# Altium PCB PCB_Bat.PcbDoc (part 1 of 2)
Units mm, origin at the board's own origin, x right, y up, seen from the top; angles counter-clockwise.
Board outline 154 x 85 mm, 2 copper layers (Top Layer, Bottom Layer); 134 components, 100 nets, 509 pads, 1285 vias.
Unrouted connection lines stored in the file: 8.
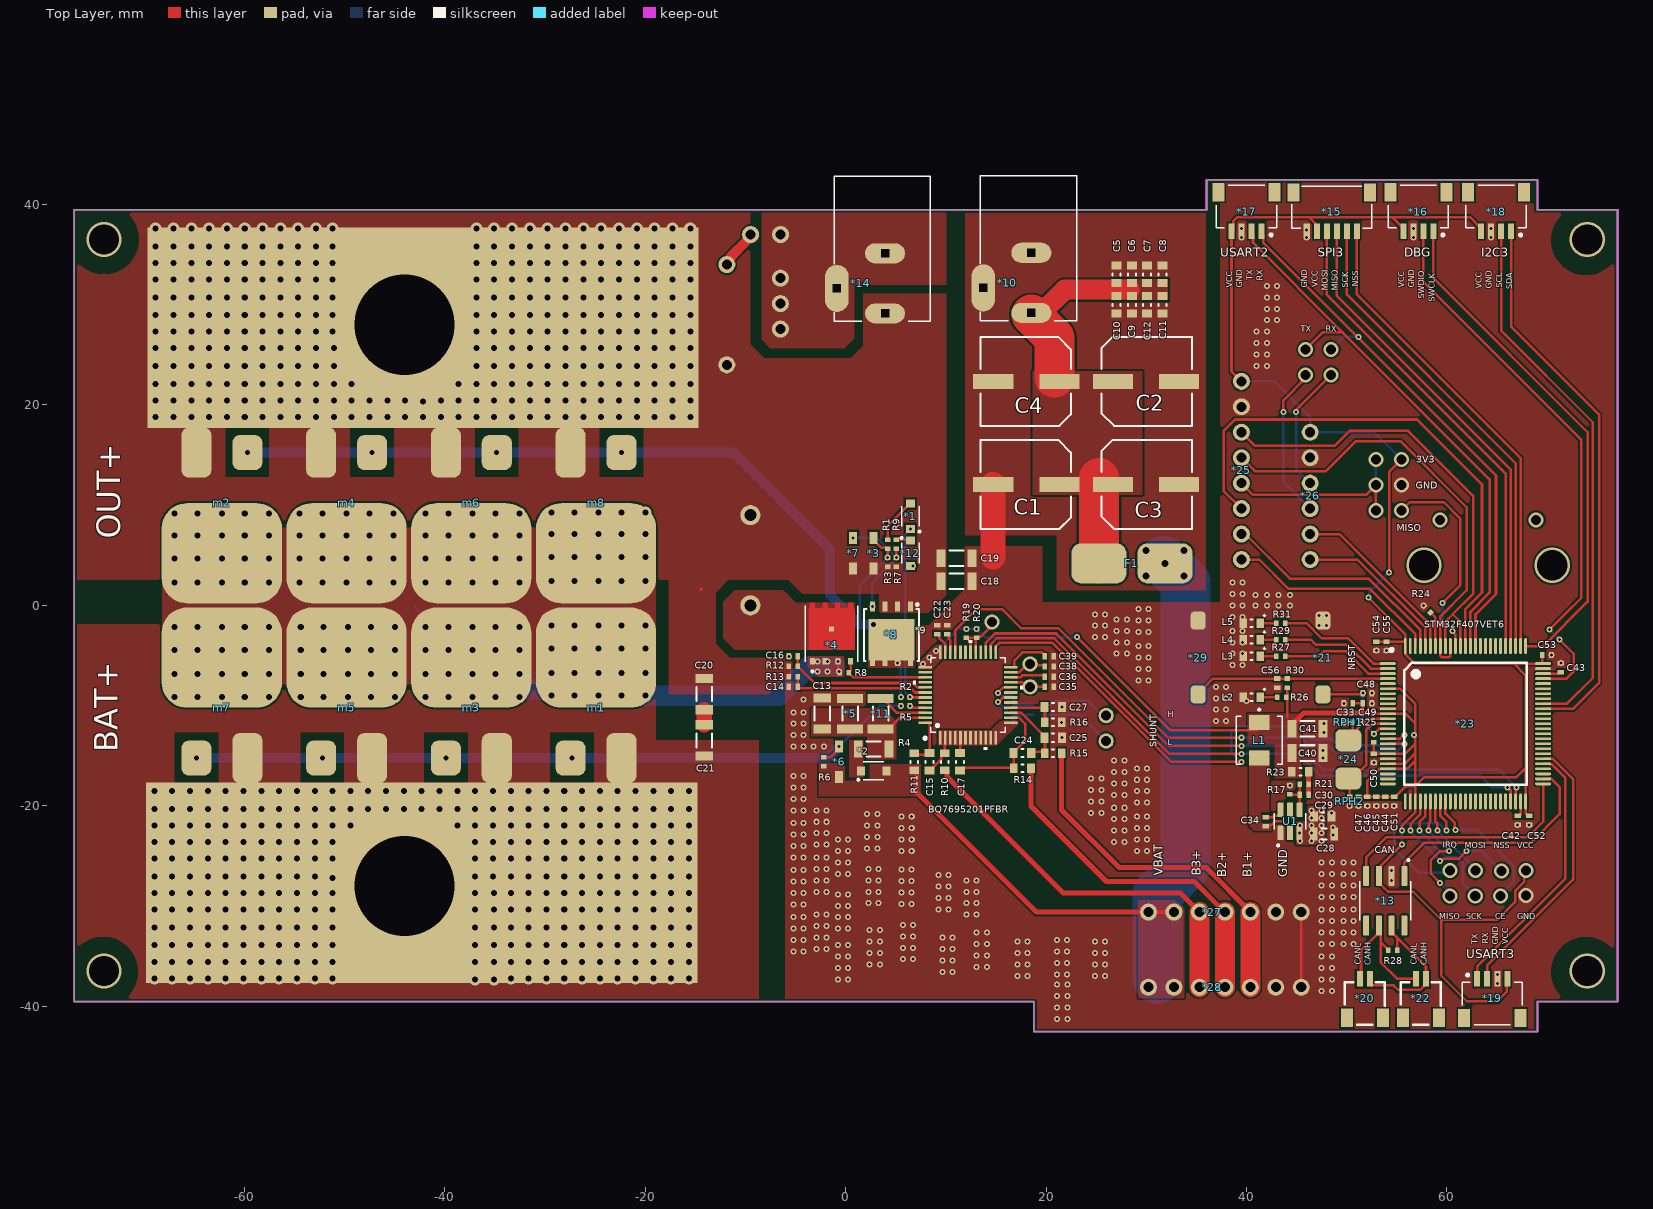
[diagram p0: Top Layer view]
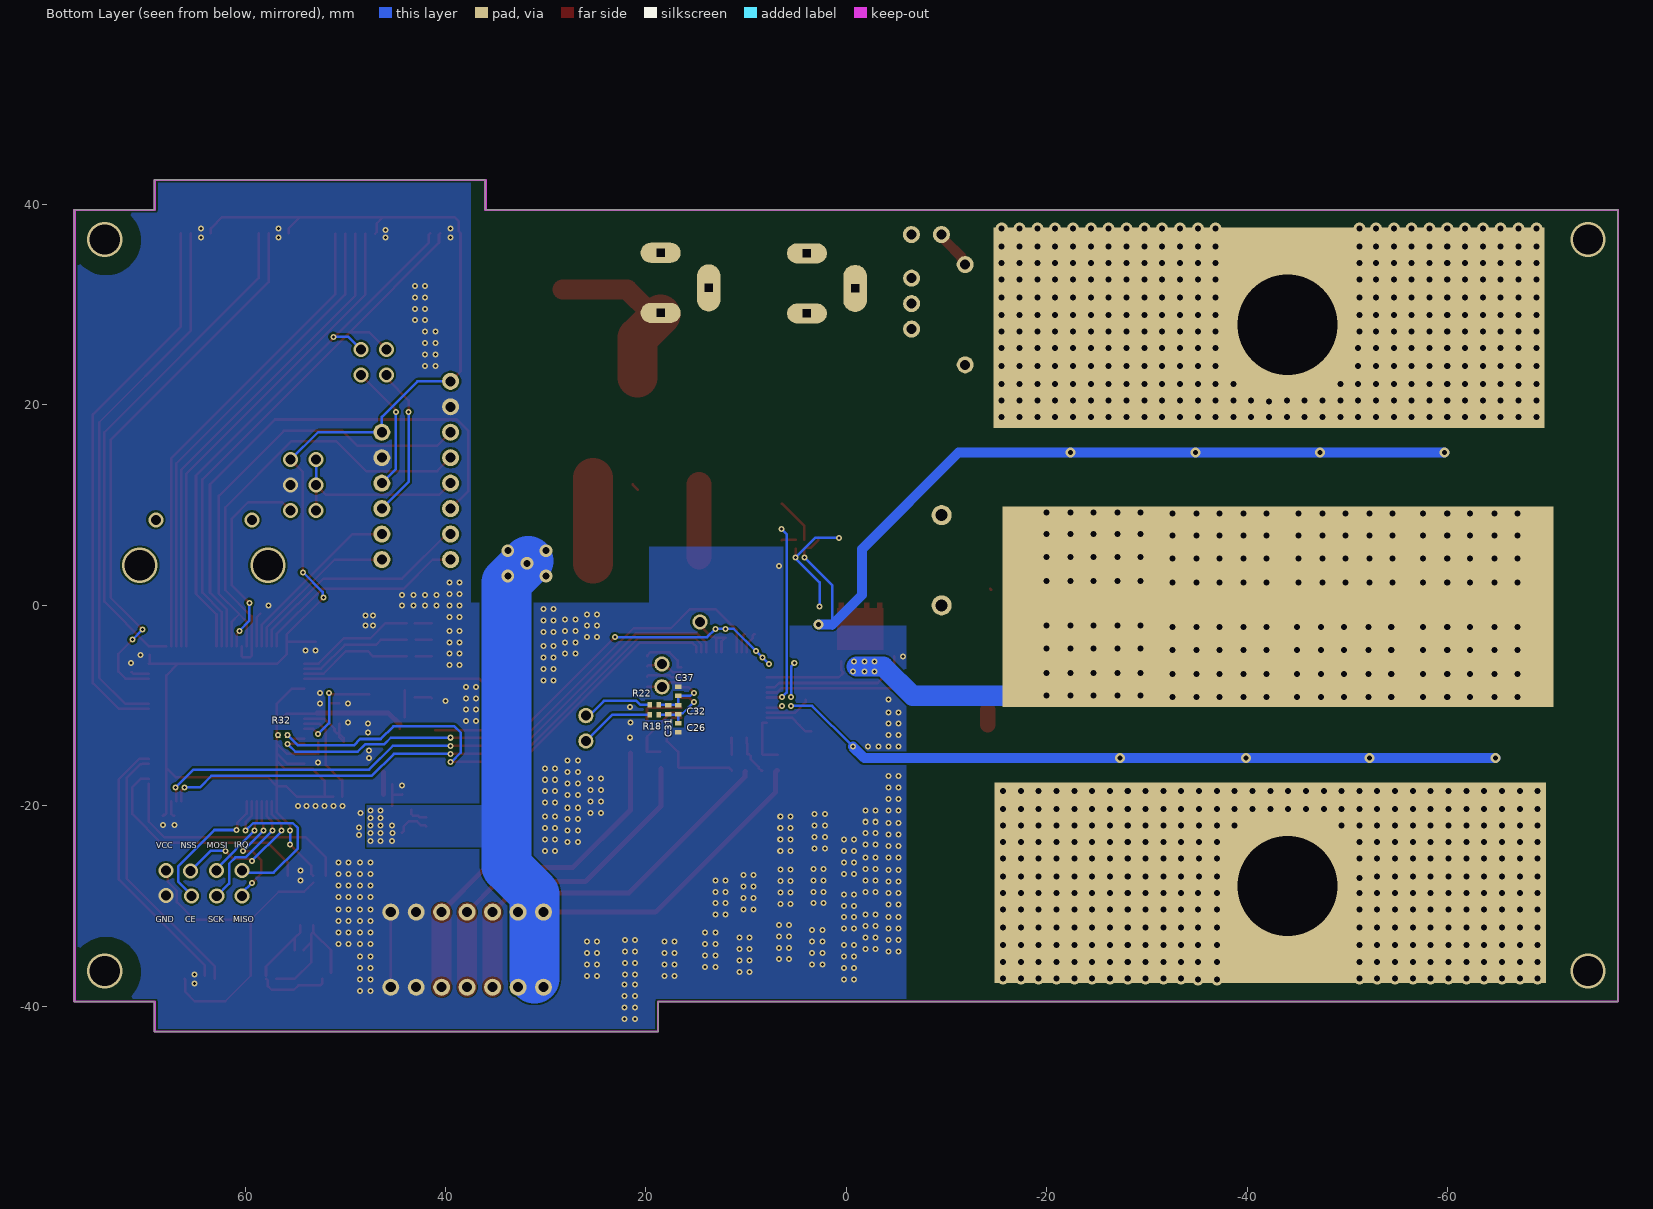
[diagram p1: Bottom Layer view, seen from below]
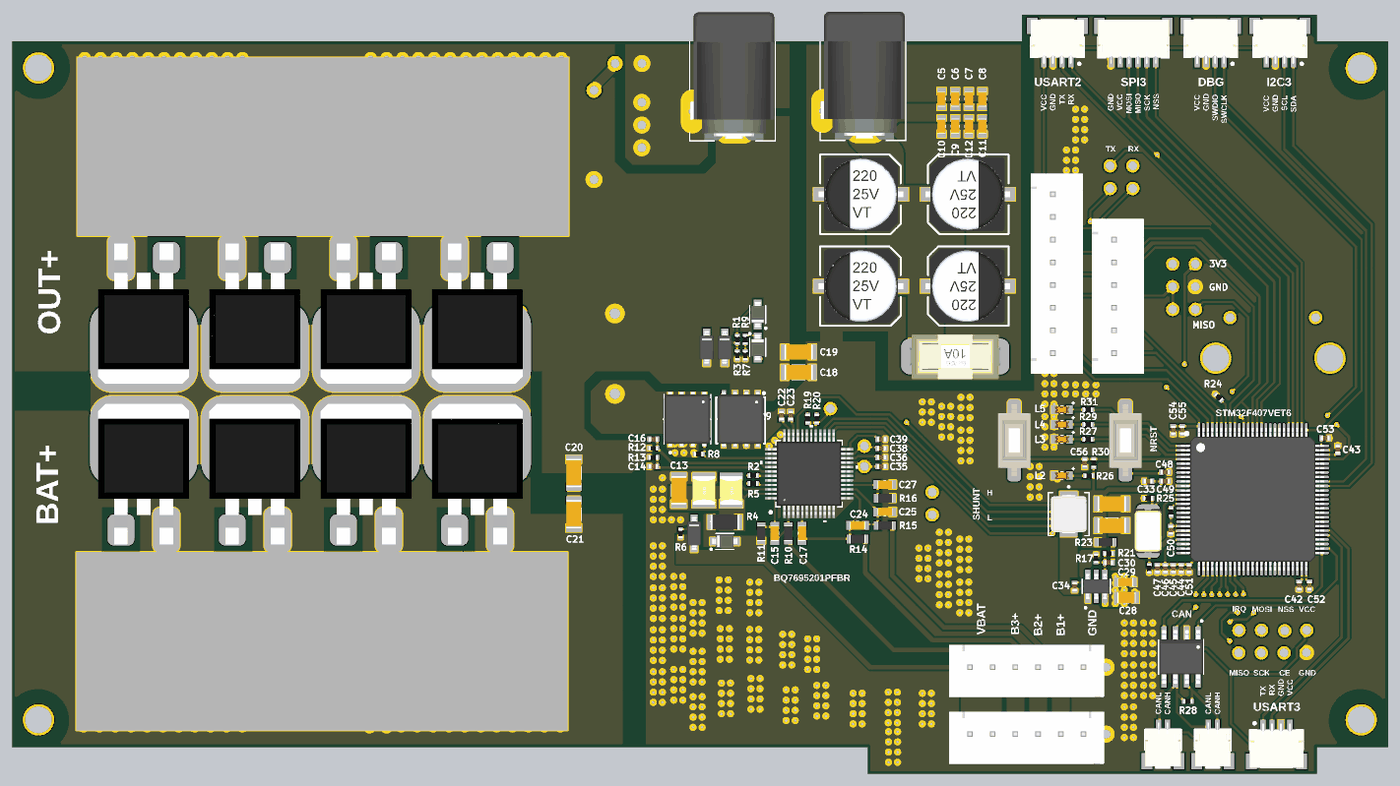
[diagram p3: 3D render of the assembled board from above, using the file's embedded part models]
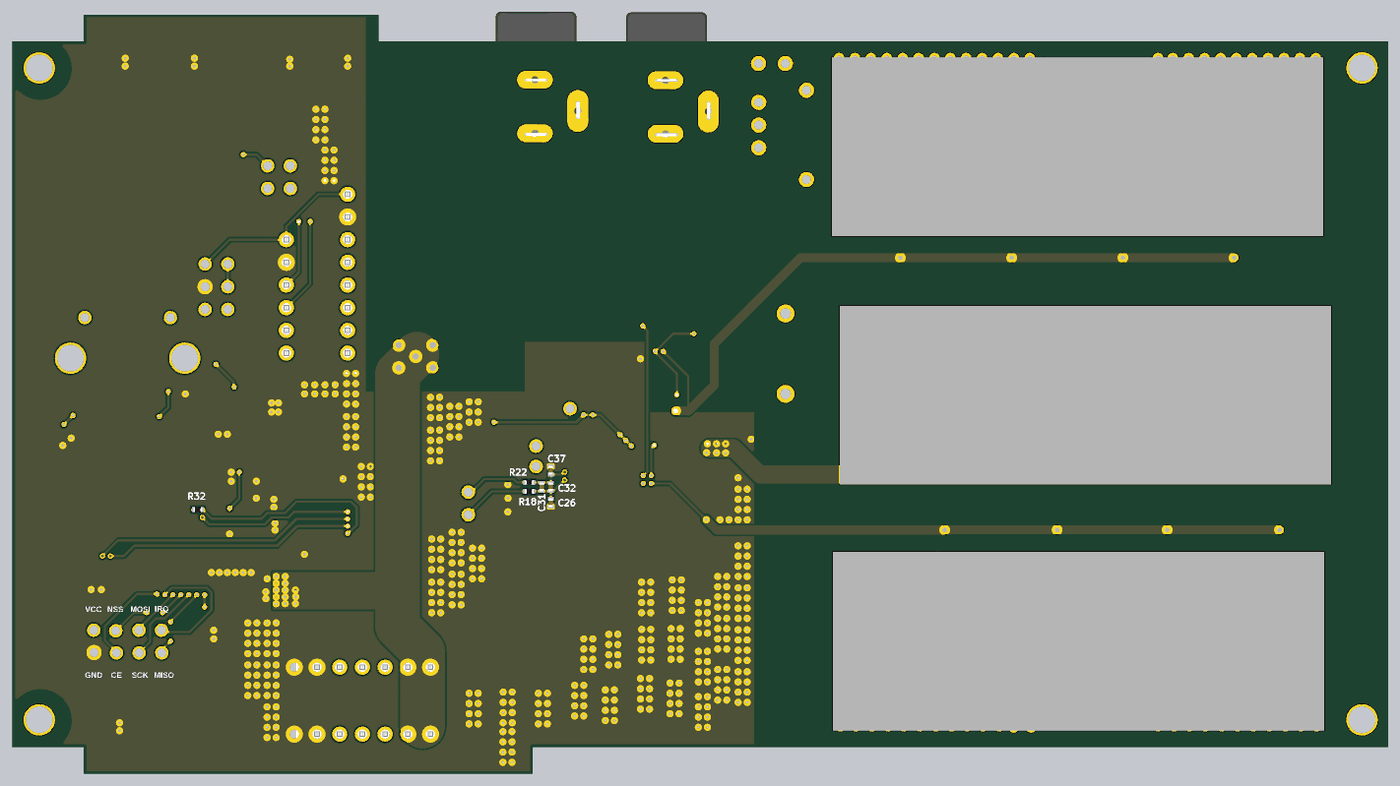
[diagram p4: 3D render of the assembled board from below, using the file's embedded part models]

## Layer stack, top to bottom
Top Solder: solder mask 0.0102, Solder Resist, Dk 3.5
Top Layer: signal copper 0.0356
Dielectric 1: dielectric 0.32, FR-4, Dk 4.8
Bottom Layer: signal copper 0.0356
Bottom Solder: solder mask 0.0102, Solder Resist, Dk 3.5

## Board outline
18.796,-42.539 18.796,-39.539 -76.956,-39.539 -76.956,39.461 36.044,39.461 36.044,42.461 69.044,42.461 69.044,39.461 77.044,39.461 77.044,-39.539 69.044,-39.539 69.044,-42.539

## Design rules (kind name [scope] priority, off if disabled: settings)
Clearance [All] p1: gap=0.2 ignorepadtopadclearanceinfootprint=TRUE
PlaneConnect [All] p1: planeconnectstyle=Direct reliefexpansion=0.508 reliefentries=4 reliefconductorwidth=0.254 reliefairgap=0.254
PolygonConnect [All] p1: connectstyle=Direct reliefconductorwidth=0.254 reliefentries=4 polygonreliefangle="90 Angle" airgapwidth=0.254
RoutingVias [All] p1: holewidth=0.3 width=0.6 viastyle="Through Hole" minholewidth=0.3 minwidth=0.6 maxholewidth=10 maxwidth=10
SolderMaskExpansion [All] p1: expansion=0.102 istentingtop=FALSE
SupplyNets "Schematic Supply Nets_2" [InNet('OUT+')] p1: voltage=0.000
SupplyNets "Schematic Supply Nets_3" [InNet('GND')] p2: voltage=0.000
SupplyNets "Schematic Supply Nets" [InNet('BAT+')] p3: voltage=0.000
SupplyNets "Schematic Supply Nets_1" [InNet('VCC_3V')] p4: voltage=0.000
Width [All] p1: maxlimit=10 minlimit=0.254 preferedwidth=0.254
29 further rules are at their usual default settings.

## Components (designator, comment, footprint, x,y, rotation, side; value= is the part's Value field where it differs from the comment)
*1 "1N5819_SOD323" 1N5819_SOD323 6.477,8.89 r270 top
*2 "1N5819_SOD323" 1N5819_SOD323 2.794,-16.51 r180 top
*3 "MMSZ5246B-7-F-16V" MMSZ5246B-7-F-16V 2.794,5.207 r270 top
*4 "AON6407" AON6407 -1.397,-2.373 r90 top
*5 "1uF" CAP_1210 0.45,-10.795 r270 top
*6 "MMSZ5246B-7-F-16V" MMSZ5246B-7-F-16V -0.635,-15.621 r270 top
*7 "MMSZ5246B-7-F-16V" MMSZ5246B-7-F-16V 0.762,5.207 r270 top
*8 "AON6354" AON6354 4.572,-3.096 r270 top
*9 "BQ7695201PFBR" BQ7695201PFBR 12.217,-8.943 r90 top
*10 "DC005" DC005 18.669,31.679 r270 top
*11 "0.47uF" CAP_1210 3.498,-10.795 r270 top
*12 "1N5819_SOD323" 1N5819_SOD323 6.477,5.207 r90 top
*13 "SN65HVD232DR" SN65HVD232DR 53.848,-29.464 r270 top
*14 "DC005" DC005 4.064,31.623 r270 top
*15 "SM06B" SM06B 48.514,39.243 r180 top
*16 "SM04B" SM04B 57.15,39.5 r180 top
*17 "SM04B" SM04B 40.005,39.5 r180 top
*18 "SM04B" SM04B 64.903,39.5 r180 top
*19 "SM04B" SM04B 64.522,-39.432 r0 top
*20 "SM02B" SMB02 51.816,-39.751 r0 top
*21 "3x6x2.5" 3x6x2.5 47.625,-5.207 r270 top
*22 "SM02B" SMB02 57.404,-39.751 r0 top
*23 "STM32F407VET6" STM32F407VET6 62.23,-11.176 r0 top
*24 "CRYSTAL_5032" CRYSTAL_5032 50.165,-15.367 r270 top
*25 "XH_8P_Vertical" XH_8P_Vertical 39.497,13.462 r270 top
*26 "XH_6P_Vertical" XH_6P_Vertical 46.355,10.922 r270 top
*27 "XH_6P_Vertical" XH_6P_Vertical 36.576,-30.607 r180 top
*28 "XH_6P_Vertical" XH_6P_Vertical 36.576,-38.1 r180 top
*29 "3x6x2.5" 3x6x2.5 35.179,-5.207 r270 top
C1 "220uF" E-CAP_8x10 18.034,12.065 r180 top
C2 "220uF" E-CAP_8x10 29.972,22.352 r0 top
C3 "220uF" E-CAP_8x10 29.972,12.065 r0 top
C4 "220uF" E-CAP_8x10 18.034,22.352 r180 top
C5 "0.1uF" CAP_0603 27.051,33.02 r270 top
C6 "0.1uF" CAP_0603 28.575,33.02 r270 top
C7 "0.1uF" CAP_0603 30.099,33.02 r270 top
C8 "0.1uF" CAP_0603 31.623,33.02 r270 top
C9 "1uF" CAP_0603 28.575,29.972 r90 top
C10 "1uF" CAP_0603 27.051,29.972 r90 top
C11 "1uF" CAP_0603 31.623,29.972 r90 top
C12 "1uF" CAP_0603 30.099,29.972 r90 top
C13 "100pF" CAP_1206 -2.344,-10.795 r270 top
C14 "0.1uF" CAP_0402 -5.207,-8.128 r180 top
C15 "220nF" CAP_0603 8.382,-15.621 r270 top
C16 "0.1uF" CAP_0402 -5.207,-5.08 r0 top
C17 "220nF" CAP_0603 11.43,-15.621 r90 top
C18 "0.1uF" CAP_1206 11.049,2.413 r180 top
C19 "0.1uF" CAP_1206 11.049,4.699 r180 top
C20 "0.1uF" CAP_1206 -14.097,-8.864 r270 top
C21 "0.1uF" CAP_1206 -14.097,-13.462 r270 top
C22 "0.1uF" CAP_0402 9.144,-2.413 r90 top
C23 "0.1uF" CAP_0402 10.16,-2.413 r90 top
C24 "220nF" CAP_0603 17.653,-14.732 r180 top
C25 "220nF" CAP_0603 20.701,-13.208 r180 top
C26 "0.1uF" CAP_0402 16.764,-12.192 r270 bottom
C27 "220nF" CAP_0603 20.701,-10.16 r180 top
C28 "10uF" CAP_0805 47.752,-22.86 r0 top
C29 "0.1uF" CAP_0603 47.625,-21.082 r180 top
C30 "47pF" CAP_0402 45.753,-18.887 r180 top
C31 "0.1uF" CAP_0402 17.78,-10.414 r270 bottom
C32 "100pF" CAP_0402 16.764,-10.414 r270 bottom
C33 "0.1uF" CAP_0402 50.165,-9.779 r180 top
C34 "0.1uF" CAP_0402 41.93,-21.591 r90 top
C35 "0.1uF" CAP_0402 20.32,-8.128 r180 top
C36 "0.1uF" CAP_0402 20.32,-7.112 r180 top
C37 "0.1uF" CAP_0402 16.764,-8.567 r270 bottom
C38 "0.1uF" CAP_0402 20.32,-6.096 r180 top
C39 "2.2uF" CAP_0402 20.32,-5.08 r180 top
C40 "22uF" CAP_1206 46.101,-14.732 r180 top
C41 "22uF" CAP_1206 46.101,-12.319 r180 top
C42 "10uF" CAP_0402 67.056,-21.463 r90 top
C43 "10uF" CAP_0402 71.374,-6.223 r270 top
C44 "0.1uF" CAP_0402 53.848,-19.558 r270 top
C45 "1uF" CAP_0402 52.959,-19.558 r90 top
C46 "0.1uF" CAP_0402 52.07,-19.558 r90 top
C47 "1uF" CAP_0402 51.181,-19.558 r90 top
C48 "0.1uF" CAP_0402 52.07,-8.763 r0 top
C49 "0.1uF" CAP_0402 52.07,-9.779 r180 top
C50 "0.1uF" CAP_0402 52.705,-15.24 r90 top
C51 "0.1uF" CAP_0402 54.737,-19.558 r90 top
C52 "0.1uF" CAP_0402 68.199,-21.463 r90 top
C53 "0.1uF" CAP_0402 69.977,-4.953 r180 top
C54 "0.1uF" CAP_0402 52.959,-4.064 r90 top
C55 "4.7uF" CAP_0402 53.975,-4.064 r90 top
C56 "0.1uF" CAP_0402 43.053,-7.747 r90 top
F1 "3A" FUSE_HOLDER_1808/2410 28.575,4.191 r180 top
L1 "6.8uH" IND_0420 41.275,-13.462 r270 top
L2 "LED_0603" LED_0603 40.513,-9.144 r0 top
L3 "LED_0603" LED_0603 40.513,-5.08 r0 top
L4 "LED_0603" LED_0603 40.513,-3.429 r0 top
L5 "LED_0603" LED_0603 40.513,-1.778 r0 top
m1 "TO-263" TO-263 -24.892,-7.239 r0 top
m2 "TO-263" TO-263 -62.23,7.239 r180 top
m3 "TO-263" TO-263 -37.338,-7.239 r0 top
m4 "TO-263" TO-263 -49.784,7.239 r180 top
m5 "TO-263" TO-263 -49.784,-7.239 r0 top
m6 "TO-263" TO-263 -37.338,7.239 r180 top
m7 "TO-263" TO-263 -62.23,-7.239 r0 top
m8 "TO-263" TO-263 -24.892,7.239 r180 top
R1 "7.5K" RES_0402 4.191,6.096 r90 top
R2 "10K" RES_0402 5.969,-9.144 r0 top
R3 "10M" RES_0402 4.191,4.318 r90 top
R4 "100R" res_1206 2.794,-14.351 r0 top
R5 "5.1K" RES_0402 5.969,-10.033 r180 top
R6 "10M" RES_0402 -2.159,-15.621 r90 top
R7 "10M" RES_0402 5.08,4.318 r270 top
R8 "10M" RES_0402 -0.127,-6.731 r0 top
R9 "10K" RES_0402 5.08,6.096 r270 top
R10 "20R" RES_0603 9.906,-15.621 r90 top
R11 "20R" RES_0603 6.858,-15.621 r270 top
R12 "10K" RES_0402 -5.207,-6.096 r180 top
R13 "10K" RES_0402 -5.207,-7.112 r180 top
R14 "20R" RES_0603 17.653,-16.256 r180 top
R15 "20R" RES_0603 20.701,-14.732 r180 top
R16 "20R" RES_0603 20.701,-11.684 r180 top
R17 "20K" RES_0402 44.323,-18.415 r90 top
R18 "100R" RES_0402 19.177,-10.922 r180 bottom
R19 "10K" RES_0402 12.065,-2.794 r90 top
R20 "10K" RES_0402 13.081,-2.794 r90 top
R21 "91K" RES_0402 45.753,-17.871 r180 top
R22 "100R" RES_0402 19.177,-9.906 r180 bottom
R23 "49.9R" RES_0603 45.372,-16.601 r180 top
R24 "10K" RES_0402 58.039,-0.381 r315 top
R25 "10K" RES_0402 52.705,-13.208 r270 top
R26 "1K" RES_0402 43.536,-9.177 r180 top
R27 "1K" RES_0402 43.434,-5.08 r0 top
R28 "120R" RES_0402 54.61,-34.417 r0 top
R29 "1K" RES_0402 43.434,-3.429 r180 top
R30 "10K" RES_0402 44.069,-7.747 r90 top
R31 "1K" RES_0402 43.434,-1.778 r180 top
R32 "10K" RES_0402 56.261,-12.954 r0 bottom
RPH1 "20pF" RES_0402 50.165,-11.684 r180 top
RPH2 "20pF" RES_0402 50.292,-19.558 r90 top
U1 "TPS54302DDCT" SOT95P280X110-6N 44.356,-21.554 r90 top

## Footprints (in the part's own frame and the unit in brackets; to place one, negate y for a bottom-side part, rotate by r counter-clockwise, add the part's x,y. Pads: shape width x height; smd on the part's side, far side on the other; paste and mask are expansions set on the pad)
1N5819_SOD323 [mm]
  rect 0.8x0.9 smd: 1(1.27,0) 2(-1.27,0)
  silkscreen extent -1.02,-0.89 1.62,0.99, body extent -1.43,-0.75 1.43,0.75, height 1.16
3x6x2.5 [mm]
  rrect50% 1.8x1.5 smd: 1(3.683,0) 2(-3.683,0)
  body extent -4.03,-1.83 4.03,1.83, height 2.51
AON6354 [mm]
  rect 1x0.5 smd: 1(-3,-1.905) 3(-3,1.905) 3(-3,-0.635) 3(-3,0.635)
  rect 4.12x4.6 smd: 2(0.333,0)
  rect 0.55x0.5 smd: 2(2.668,1.905) 2(2.668,-0.635) 2(2.668,0.635) 2(2.668,-1.905)
  silkscreen extent -3.26,-2.75 2.47,2.75, body extent -3.28,-2.75 2.77,2.75, height 0.95
AON6407 [mm]
  rect 0.65x0.5 smd: 1(-3.215,1.905) 2(-3.215,0.635) 3(-3.215,-0.635) 4(-3.215,-1.905)
  rect 0.5x0.5 smd paste-1 mask+0: 5_8(0,0)
  Top Layer region: 2.06,2.155 2.61,2.155 2.61,1.655 2.06,1.655 2.06,0.885 2.61,0.885 2.61,0.385 2.06,0.385 2.06,-0.385 2.61,-0.385 2.61,-0.885 2.06,-0.885 2.06,-1.655 2.61,-1.655 2.61,-2.155 2.06,-2.155 2.06,-2.3 -2.06,-2.3 -2.06,2.3 2.06,2.3
  silkscreen extent -4.31,-2.62 2.32,2.62, body extent -3.48,-2.75 2.57,2.75, height 0.95
BQ7695201PFBR [mil]
  rect 53.5x10 smd paste+0 mask+0: 1(-168.25,108.3) 2(-168.25,88.6) 3(-168.25,68.91) 4(-168.25,49.22) 5(-168.25,29.53) 6(-168.25,9.85) 7(-168.25,-9.85) 8(-168.25,-29.53) 9(-168.25,-49.22) 10(-168.25,-68.91) 11(-168.25,-88.61) 12(-168.25,-108.29) 25(168.25,-108.29) 26(168.25,-88.61) 27(168.25,-68.91) 28(168.25,-49.22) 29(168.25,-29.53) 30(168.25,-9.85) 31(168.25,9.85) 32(168.25,29.53) 33(168.25,49.22) 34(168.25,68.91) 35(168.25,88.6) 36(168.25,108.3)
  rect 10x53.5 smd paste+0 mask+0: 13(-108.29,-168.25) 14(-88.61,-168.25) 15(-68.91,-168.25) 16(-49.22,-168.25) 17(-29.53,-168.25) 18(-9.84,-168.25) 19(9.85,-168.25) 20(29.54,-168.25) 21(49.22,-168.25) 22(68.91,-168.25) 23(88.61,-168.25) 24(108.3,-168.25) 37(108.3,168.25) 38(88.61,168.25) 39(68.91,168.25) 40(49.22,168.25) 41(29.54,168.25) 42(9.85,168.25) 43(-9.84,168.25) 44(-29.53,168.25) 45(-49.22,168.25) 46(-68.91,168.25) 47(-88.61,168.25) 48(-108.29,168.25)
  silkscreen extent -215,-215 215,215, body extent -181,-181 181,181, height 47
CAP_0402 [mm]
  rect 0.45x0.64 smd: 1(-0.45,0) 2(0.45,0)
  body extent -0.5,-0.25 0.5,0.25, height 0.55
CAP_0603 [mm]
  rect 0.8x1 smd: 1(-0.875,0) 2(0.875,0)
  silkscreen extent -0.1,-0.4 0.1,0.4, body extent -0.87,-0.48 0.87,0.48, height 0.7
CAP_0805 [mm]
  rect 0.75x1.3 smd: 1(-1.025,0.056) 2(1.025,0.056)
  silkscreen extent -0.25,-0.49 0.25,0.61, body extent -1.02,-0.57 1.03,0.68, height 0.7
CAP_1206 [mm]
  rect 0.9x1.75 smd: 1(-1.55,0) 2(1.55,0)
  silkscreen extent -0.7,-0.77 0.7,0.77, body extent -1.6,-0.85 1.6,0.85, height 0.7
CAP_1210 [mm]
  rect 0.9x2.6 smd: 1(-1.524,0) 2(1.524,0)
  silkscreen extent -0.7,-0.77 0.7,0.77, body extent -1.6,-1.25 1.6,1.25, height 2.7
CRYSTAL_5032 [mm]
  rrect50% 2.2x2.6 smd: 1(-1.905,0) 2(1.905,0)
  body extent -2.5,-1.6 2.5,1.6, height 0.8
DC005 [mm]
  oval 4.7x2.35 hole 0.8 square: 1(0,-4.927)
  oval 2x4 hole 0.8 square: 2(-3.5,-0.127) 3(2.5,-0.127)
  silkscreen extent -11.18,-5.21 3.3,4.37, body extent -11.09,-5.15 3.21,4.25, height 11
E-CAP_8x10 [mm]
  rect 4x1.5 smd: 1(-3.302,0) 2(3.302,0)
  silkscreen extent -4.45,-4.45 4.57,4.45, body extent -4.75,-4.15 4.75,4.15, height 10.51
FUSE_HOLDER_1808/2410 [mm]
  rrect50% 5.5x4 smd: 1(-3.302,0) 2(3.302,0)
  body extent -5.1,-2.49 5.1,2.54, height 4.16
IND_0420 [mm]
  rect 1.5x2 smd: 1(-1.778,0) 2(1.778,0)
  silkscreen extent -3.15,-2.29 2.41,2.29, body extent -2.15,-2 2.15,2, height 2.2
LED_0603 [mm]
  rect 0.75x0.95 smd: 1(-0.85,0) 2(0.85,0)
  silkscreen extent -0.1,-0.38 1.4,0.89, body extent -0.8,-0.4 0.8,0.4, height 0.53
MMSZ5246B-7-F-16V [mm]
  rect 1.2x0.8 smd: 1(-1.524,0) 2(1.524,0)
  body extent -1.83,-0.77 1.83,0.77, height 1.44
RES_0402 [mm]
  rect 0.45x0.55 smd: 1(-0.45,0) 2(0.45,0)
  body extent -0.51,-0.25 0.51,0.25, height 0.36
RES_0603 [mm]
  rect 0.75x0.95 smd: 1(-0.85,0) 2(0.85,0)
  silkscreen extent -0.1,-0.38 0.1,0.38, body extent -0.87,-0.48 0.87,0.48, height 0.7
res_1206 [mm]
  rect 0.85x1.7 smd: 1(-1.51,0.015) 2(1.54,0.015)
  silkscreen extent -0.68,-0.73 0.72,0.77, body extent -1.58,-0.83 1.62,0.87, height 0.7
SM04B [mm]
  rect 0.6x1.55 smd: 1(-1.5,2.159) 2(-0.5,2.159) 3(0.5,2.159) 4(1.5,2.159)
  rect 1.2x1.8 smd: S1(-2.8,-1.716) S2(2.8,-1.716)
  silkscreen extent -3,-2.42 3,2.64, body extent -3,-2.41 3,2.54, height 3.25
SM06B [mm]
  rect 0.6x1.55 smd: 1(-2.5,1.905) 2(-1.5,1.905) 3(-0.5,1.905) 4(0.5,1.905) 5(1.5,1.905) 6(2.5,1.905)
  rect 1.2x1.8 smd: S1(-3.8,-1.97) S2(3.8,-1.97)
  silkscreen extent -4,-2.6 4,1.61, body extent -4,-2.67 4,2.28, height 2.95
SMB02 [mm]
  rect 0.6x1.55 smd: 1(-0.5,2.483) 2(0.5,2.483)
  rect 1.2x1.8 smd: S1(-1.8,-1.392) S2(1.8,-1.392)
  silkscreen extent -2,-2.09 2,2.16, body extent -2,-1.97 2,2.98, height 2.95
SN65HVD232DR [mm]
  rrect25% 1.97x0.6 smd: 1(-2.47,1.905) 2(-2.47,0.635) 3(-2.47,-0.635) 4(-2.47,-1.905) 5(2.47,-1.905) 6(2.47,-0.635) 7(2.47,0.635) 8(2.47,1.905)
  silkscreen extent -4.14,-2.52 1.95,2.52, body extent -3,-2.45 3,2.45, height 1.75
SOT95P280X110-6N [mm]
  rrect25% 1.45x0.59 smd: 1(-1.155,0.95) 2(-1.155,0) 3(-1.155,-0.95) 4(1.155,-0.95) 5(1.155,0) 6(1.155,0.95)
  silkscreen extent -2.5,-1.57 0.8,1.57, body extent -1.4,-1.45 1.4,1.45, height 1.1
STM32F407VET6 [mm]
  oval 1.6x0.28 smd: 1(-8.131,5.365) 2(-8.131,4.865) 3(-8.131,4.365) 4(-8.131,3.865) 5(-8.131,3.365) 6(-8.131,2.865) 7(-8.131,2.365) 8(-8.131,1.865) 9(-8.131,1.365) 10(-8.131,0.865) 11(-8.131,0.365) 12(-8.131,-0.135) 13(-8.131,-0.635) 14(-8.131,-1.135) 15(-8.131,-1.635) 16(-8.131,-2.135) 17(-8.131,-2.635) 18(-8.131,-3.135) 19(-8.131,-3.635) 20(-8.131,-4.135) 21(-8.131,-4.635) 22(-8.131,-5.135) 23(-8.131,-5.635) 24(-8.131,-6.135) 25(-8.131,-6.635) 51(7.369,-6.635) 52(7.369,-6.135) 53(7.369,-5.635) 54(7.369,-5.135) 55(7.369,-4.635) 56(7.369,-4.135) 57(7.369,-3.635) 58(7.369,-3.135) 59(7.369,-2.635) 60(7.369,-2.135) 61(7.369,-1.635) 62(7.369,-1.135) 63(7.369,-0.635) 64(7.369,-0.135) 65(7.369,0.365) 66(7.369,0.865) 67(7.369,1.365) 68(7.369,1.865) 69(7.369,2.365) 70(7.369,2.865) 71(7.369,3.365) 72(7.369,3.865) 73(7.369,4.365) 74(7.369,4.865) 75(7.369,5.365)
  oval 0.28x1.6 smd: 26(-6.381,-8.385) 27(-5.881,-8.385) 28(-5.381,-8.385) 29(-4.881,-8.385) 30(-4.381,-8.385) 31(-3.881,-8.385) 32(-3.381,-8.385) 33(-2.881,-8.385) 34(-2.381,-8.385) 35(-1.881,-8.385) 36(-1.381,-8.385) 37(-0.881,-8.385) 38(-0.381,-8.385) 39(0.119,-8.385) 40(0.619,-8.385) 41(1.119,-8.385) 42(1.619,-8.385) 43(2.119,-8.385) 44(2.619,-8.385) 45(3.119,-8.385) 46(3.619,-8.385) 47(4.119,-8.385) 48(4.619,-8.385) 49(5.119,-8.385) 50(5.619,-8.385) 76(5.619,7.115) 77(5.119,7.115) 78(4.619,7.115) 79(4.119,7.115) 80(3.619,7.115) 81(3.119,7.115) 82(2.619,7.115) 83(2.119,7.115) 84(1.619,7.115) 85(1.119,7.115) 86(0.619,7.115) 87(0.119,7.115) 88(-0.381,7.115) 89(-0.881,7.115) 90(-1.381,7.115) 91(-1.881,7.115) 92(-2.381,7.115) 93(-2.881,7.115) 94(-3.381,7.115) 95(-3.881,7.115) 96(-4.381,7.115) 97(-4.881,7.115) 98(-5.381,7.115) 99(-5.881,7.115) 100(-6.381,7.115)
  silkscreen extent -7.85,-6.73 5.71,6.83, body extent -8.38,-8.63 7.62,7.36, height 1.6
TO-263 [mm]
  rrect50% 12x10 smd: D(0,2.032)
  rrect50% 3x3.5 smd: G(-2.54,-8.001)
  rrect50% 3x5 smd: S(2.54,-8.001)
  body extent -5.1,-9.6 5.1,6.1, height 4.4
XH_6P_Vertical [mm]
  round 1.7 hole 1: 1(-6.35,0) 2(-3.81,0) 3(-1.27,0) 4(1.27,0) 5(3.81,0) 6(6.35,0)
  body extent -8.69,-2.49 8.69,3.35, height 7.21
XH_8P_Vertical [mm]
  round 1.7 hole 1: 1(-8.89,0) 2(-6.35,0) 3(-3.81,0) 4(-1.27,0) 5(1.27,0) 6(3.81,0) 7(6.35,0) 8(8.89,0)
  body extent -11.23,-2.49 11.23,3.35, height 7.21

## Part data
*5 *11: library part CAP_1210
C1 C2 C3 C4: library part E-CAP_8x10
C5 C6 C7 C8 C9 C10 C11 C12 C15 C17 C24 C25 C27 C29: library part CAP_0603
C13 C18 C19 C20 C21 C40 C41: library part CAP_1206
C14 C16 C22 C23 C26 C30 C31 C32 C33 C34 C35 C36 C37 C38 C39 C42 C43 C44 C45 C46 C47 C48 C49 C50 C51 C52 C53 C54 C55 C56: library part CAP_0402
C28: library part CAP_0805
F1: library part FUSE_HOLDER_1808/2410
L1: library part IND_0420
R1 R2 R3 R5 R6 R7 R8 R9 R12 R13 R17 R18 R19 R20 R21 R22 R24 R25 R26 R27 R28 R29 R30 R31 R32 RPH1 RPH2: library part RES_0402
R4: library part RES_1206
R10 R11 R14 R15 R16 R23: library part RES_0603
U1: "4.5-V to 28-V Input, 3-A Output, EMI Friendly Synchronous Step-Down Converter", Package="SOT-23-THN-6 Texas Instruments", Check_prices=https://www.snapeda.com/parts/TPS54302DDCT/Texas+Instruments/view-part/?ref=eda, MF="Texas Instruments", MP=TPS54302DDCT, SnapEDA_Link=https://www.snapeda.com/parts/TPS54302DDCT/Texas+Instruments/view-part/?ref=snap

## Free pads (board coordinates)
  rect 55x20 smd far side: 2(-43.053,-0.127) 2(-42.291,-27.686) 2(-42.164,27.686)
  rect 55x20 smd: 2(-42.291,-27.686) 2(-42.164,27.686)
  round 2 hole 1.2: 7(-9.5,0) 7(-9.5,9)
  round 1.524 hole 1: 8(14.605,-1.651) 8(18.415,-8.128) 8(18.415,-5.842) 8(26,-13.54) 8(26,-11)
  round 1.7 hole 1: 8(45.466,-38.1) 8(45.466,-30.607) 9(-11.845,24) 9(-11.845,34) 9(-9.477,37) 9(-6.5,27.563) 9(-6.5,30.103) 9(-6.5,32.643) 9(-6.477,37)
  round 15 hole 10: 9(-44,-28) 9(-44,28)

## Via types
v1: diameter 1.2, hole 0.6, Top Layer to Bottom Layer, 768 vias
v2: diameter 0.6, hole 0.3, Top Layer to Bottom Layer, 477 vias
v3: diameter 1.5, hole 1, Top Layer to Bottom Layer, 20 vias
v4: diameter 1, hole 0.5, Top Layer to Bottom Layer, 9 vias
v5: diameter 3.5, hole 3, Top Layer to Bottom Layer, 6 vias
v6: diameter 1.27, hole 0.711, Top Layer to Bottom Layer, 5 vias

## Nets (pads, with @x,y where several pads share a name; then routed paths per layer and width w, separated by ;. In a path a pad name is that pad's centre, name@x,y a point inside that pad or via, vN(x,y) a via of type N, cw(c..) or ccw(c..) an arc to the next point about the centre after c; other vN are vias at no path point)
ADC_A: *23.23 pad.9@-9.477,37 pad.9@-11.845,34 | length 4
  Top Layer w1: pad.9@-11.845,34 -11.845,34.189 -11.495,34.539 -11.495,34.733 -9.827,36.401 -9.827,36.461 -9.477,36.811 pad.9@-9.477,37
ADC_B: *23.24
ALERT: *9.25 *23.16 R32.1 | length 54.1
  Top Layer w0.254: *9.25@14.968,-4.669 14.968,-4.117 15.348,-3.737 20.628,-3.737 32.512,-15.621 v2(39.497,-15.621) ; *23.16@54.099,-13.311 55.302,-13.311 55.659,-12.954 v2(55.753,-12.954)
  Bottom Layer w0.254: v2(39.497,-15.621) 39.423,-15.621 38.481,-14.679 38.481,-12.7 39.116,-12.065 45.212,-12.065 46.482,-13.335 48.514,-13.335 49.149,-13.97 54.737,-13.97 v2(55.753,-12.954)
B1+: *27.2 *28.2 R15.1 | length 36.2
  Top Layer w0.5: R15.1@21.551,-14.732 21.551,-20.408 27.305,-26.162 35.976,-26.162 *27.2@40.404,-30.589
  Top Layer w2: *28.2@40.386,-38.1 *27.2@40.386,-30.607
B2+: *27.3 *28.3 R14.1 | length 35
  Top Layer w0.5: R14.1@18.503,-16.256 18.503,-20.027 26.035,-27.559 34.798,-27.559 *27.3@37.846,-30.607
  Top Layer w2: *28.3@37.846,-38.1 *27.3@37.846,-30.607
B3+: *27.4 *28.4 R10.1 | length 38.8
  Top Layer w0.5: R10.1@10.096,-16.561 10.131,-16.596 10.131,-17.116 21.717,-28.702 33.401,-28.702 *27.4@35.306,-30.607
  Top Layer w2: *28.4@35.306,-38.1 *27.4@35.306,-30.607
BAT+: *2.2 *6.2 *27.5 *27.6 *28.5 *28.6 C21.2 C28.1 C29.2 F1.1 m1.S m3.S m5.S m7.S pad.2@-42.291,-27.686 pad.9@-44,-28 R6.1 R11.2 U1.3 | length 76.7
  Top Layer w0.5: R11.2@6.858,-16.471 6.958,-16.471 7.083,-16.596 7.083,-18.64 19.05,-30.607 *27.6@30.226,-30.607 *27.5@32.766,-30.607
  Bottom Layer w5: 31.115,-37.211 31.115,-28.829 33.909,-26.035 33.909,2.286 v6@31.75,4.445
  other v1: -36.957,-37.338 -35.052,-37.338 -68.961,-37.211 -67.183,-37.211 -65.405,-37.211 -63.627,-37.211 -61.849,-37.211 -60.071,-37.211 -58.293,-37.211 -56.515,-37.211 -54.737,-37.211 -52.959,-37.211 -51.181,-37.211 -33.401,-37.211 -31.623,-37.211 -29.845,-37.211 -28.067,-37.211 -26.289,-37.211 -24.511,-37.211 -22.733,-37.211 -20.955,-37.211 -19.177,-37.211 -17.399,-37.211 -15.621,-37.211 -68.961,-35.56 -67.183,-35.56 -65.405,-35.56 -63.627,-35.56 -61.849,-35.56 -60.071,-35.56 -58.293,-35.56 -56.515,-35.56 -54.737,-35.56 -52.959,-35.56 -51.181,-35.56 -36.957,-35.56 -35.052,-35.56 -33.401,-35.56 -31.623,-35.56 -29.845,-35.56 -28.067,-35.56 -26.289,-35.56 -24.511,-35.56 -22.733,-35.56 -20.955,-35.56 -19.177,-35.56 -17.399,-35.56 -15.621,-35.56 -68.961,-33.909 -67.183,-33.909 -65.405,-33.909 -63.627,-33.909 -61.849,-33.909 -60.071,-33.909 -58.293,-33.909 -56.515,-33.909 -54.737,-33.909 -52.959,-33.909 -51.181,-33.909 -36.957,-33.909 -35.052,-33.909 -33.401,-33.909 -31.623,-33.909 -29.845,-33.909 -28.067,-33.909 -26.289,-33.909 -24.511,-33.909 -22.733,-33.909 -20.955,-33.909 -19.177,-33.909 -17.399,-33.909 -15.621,-33.909 -68.961,-32.131 -67.183,-32.131 -65.405,-32.131 -63.627,-32.131 -61.849,-32.131 -60.071,-32.131 -58.293,-32.131 -56.515,-32.131 -54.737,-32.131 -52.959,-32.131 -51.181,-32.131 -36.957,-32.131 -35.052,-32.131 -33.401,-32.131 -31.623,-32.131 -29.845,-32.131 -28.067,-32.131 -26.289,-32.131 -24.511,-32.131 -22.733,-32.131 -20.955,-32.131 -19.177,-32.131 -17.399,-32.131 -15.621,-32.131 -68.961,-30.353 -67.183,-30.353 -65.405,-30.353 -63.627,-30.353 -61.849,-30.353 -60.071,-30.353 -58.293,-30.353 -56.515,-30.353 -54.737,-30.353 -52.959,-30.353 -51.181,-30.353 -36.957,-30.353 -35.052,-30.353 -33.401,-30.353 -31.623,-30.353 -29.845,-30.353 -28.067,-30.353 -26.289,-30.353 -24.511,-30.353 -22.733,-30.353 -20.955,-30.353 -19.177,-30.353 -17.399,-30.353 -15.621,-30.353 -68.961,-28.702 -67.183,-28.702 -65.405,-28.702 -63.627,-28.702 -61.849,-28.702 -60.071,-28.702 -58.293,-28.702 -56.515,-28.702 -54.737,-28.702 -52.959,-28.702 -51.181,-28.702 -36.957,-28.702 -35.052,-28.702 -33.401,-28.702 -31.623,-28.702 -29.845,-28.702 -28.067,-28.702 -26.289,-28.702 -24.511,-28.702 -22.733,-28.702 -20.955,-28.702 -19.177,-28.702 -17.399,-28.702 -15.621,-28.702 -51.181,-27.178 -68.961,-27.051 -67.183,-27.051 -65.405,-27.051 -63.627,-27.051 -61.849,-27.051 -60.071,-27.051 -58.293,-27.051 -56.515,-27.051 -54.737,-27.051 -52.959,-27.051 -36.957,-27.051 -35.179,-27.051 -33.401,-27.051 -31.623,-27.051 -29.845,-27.051 -28.067,-27.051 -26.289,-27.051 -24.511,-27.051 -22.733,-27.051 -20.955,-27.051 -19.177,-27.051 -17.399,-27.051 -15.621,-27.051 -68.961,-25.273 -67.183,-25.273 -65.405,-25.273 -63.627,-25.273 -61.849,-25.273 -60.071,-25.273 -58.293,-25.273 -56.515,-25.273 -54.737,-25.273 -52.959,-25.273 -51.181,-25.273 -36.957,-25.273 -35.179,-25.273 -33.401,-25.273 -31.623,-25.273 -29.845,-25.273 -28.067,-25.273 -26.289,-25.273 -24.511,-25.273 -22.733,-25.273 -20.955,-25.273 -19.177,-25.273 -17.399,-25.273 -15.621,-25.273 -68.961,-23.622 -67.183,-23.622 -65.405,-23.622 -63.627,-23.622 -61.849,-23.622 -60.071,-23.622 -58.293,-23.622 -56.515,-23.622 -54.737,-23.622 -52.959,-23.622 -51.181,-23.622 -36.957,-23.622 -35.179,-23.622 -33.401,-23.622 -31.623,-23.622 -29.845,-23.622 -28.067,-23.622 -26.289,-23.622 -24.511,-23.622 -22.733,-23.622 -20.955,-23.622 -19.177,-23.622 -17.399,-23.622 -15.621,-23.622 -68.961,-21.971 -67.183,-21.971 -65.405,-21.971 -63.627,-21.971 -61.849,-21.971 -60.071,-21.971 -58.293,-21.971 -56.515,-21.971 -54.737,-21.971 -52.959,-21.971 -51.181,-21.971 -49.403,-21.971 -38.735,-21.971 -36.957,-21.971 -35.179,-21.971 -33.401,-21.971 -31.623,-21.971 -29.845,-21.971 -28.067,-21.971 -26.289,-21.971 -24.511,-21.971 -22.733,-21.971 -20.955,-21.971 -19.177,-21.971 -17.399,-21.971 -15.621,-21.971 -68.961,-20.32 -67.183,-20.32 -65.405,-20.32 -63.627,-20.32 -61.849,-20.32 -60.071,-20.32 -58.293,-20.32 -56.515,-20.32 -54.737,-20.32 -52.959,-20.32 -51.181,-20.32 -49.403,-20.32 -47.625,-20.32 -45.847,-20.32 -44.069,-20.32 -42.291,-20.32 -40.513,-20.32 -38.735,-20.32 -36.957,-20.32 -35.179,-20.32 -33.401,-20.32 -31.623,-20.32 -29.845,-20.32 -28.067,-20.32 -26.289,-20.32 -24.511,-20.32 -22.733,-20.32 -20.955,-20.32 -19.177,-20.32 -17.399,-20.32 -15.621,-20.32 -68.961,-18.542 -67.183,-18.542 -65.405,-18.542 -63.627,-18.542 -61.849,-18.542 -60.071,-18.542 -58.293,-18.542 -56.515,-18.542 -54.737,-18.542 -52.959,-18.542 -51.181,-18.542 -49.403,-18.542 -47.625,-18.542 -45.847,-18.542 -44.069,-18.542 -42.291,-18.542 -40.513,-18.542 -38.735,-18.542 -36.957,-18.542 -35.179,-18.542 -33.401,-18.542 -31.623,-18.542 -29.845,-18.542 -28.067,-18.542 -26.289,-18.542 -24.511,-18.542 -22.733,-18.542 -20.955,-18.542 -19.177,-18.542 -17.399,-18.542 -15.621,-18.542
  other v2: 45.339,-23.495 46.482,-23.495 47.498,-23.495 46.482,-22.733 47.498,-22.733 45.306,-22.709 45.339,-21.971 46.482,-21.971 47.498,-21.971 46.482,-21.209 47.498,-21.209 46.482,-20.447 47.498,-20.447
  other v6: 29.972,2.921 33.782,2.921 31.877,4.191 29.972,5.461 33.782,5.461
CAN1_RX: *23.70
CAN1_TX: *23.71
CAN2_RX: *13.4 *23.51 | length 24.8
  Top Layer w0.254: *13.4@51.943,-26.994 51.943,-25.146 53.975,-23.114 68.072,-23.114 69.599,-21.587 *23.51@69.599,-17.811
CAN2_TX: *13.1 *23.52 | length 23.5
  Top Layer w0.254: *13.1@55.753,-26.994 55.753,-25.654 57.712,-23.695 68.38,-23.695 71.247,-20.828 71.247,-18.139 70.424,-17.316 69.604,-17.316 *23.52@69.599,-17.311
CANH: *13.7 *20.2 *22.2 R28.2 | length 14.8
  Top Layer w0.254: *20.2@52.316,-37.268 52.316,-37.743 52.489,-37.916 54.687,-37.916 55.141,-38.37 57.339,-38.37 57.731,-37.978 57.731,-37.441 *22.2@57.904,-37.268 ; *13.7@54.483,-31.934 54.483,-32.619 55.06,-33.196 ; R28.2@55.06,-34.417 55.06,-33.196 ; *22.2@57.912,-36.957 57.912,-36.048 55.06,-33.196
CANL: *13.6 *20.1 *22.1 R28.1 | length 13.8
  Top Layer w0.254: *20.1@51.429,-36.68 51.429,-34.403 53.105,-32.727 53.213,-32.727 *13.6@53.213,-31.934 ; *13.6@53.321,-32.727 53.386,-32.792 53.386,-33.593 ; R28.1@54.16,-34.417 54.16,-34.367 53.386,-33.593 ; *22.1@56.904,-37.268 55.048,-37.268 53.386,-35.606 53.386,-33.593
CE: *23.34 | length 13.7
  Top Layer w0.254: *23.34@59.849,-19.561 59.849,-20.782 60.8,-21.733 60.8,-22.381 v2(60.833,-22.414)
  Bottom Layer w0.254: v2(60.833,-22.414) 63.054,-22.414 66.675,-26.035 66.675,-27.559 v3@65.532,-28.702
  other v3: 65.366,-29
CFETOFF: *9.29 *9.30 pad.8@14.605,-1.651 R19.1 R20.1 | length 6.4
  Top Layer w0.254: R19.1@12.065,-3.244 12.968,-3.244 R20.1@13.066,-3.244 ; R19.1@12.115,-3.244 12.467,-3.596 *9.30@12.467,-4.669 ; *9.29@12.968,-4.669 12.968,-3.342 R20.1@13.066,-3.244 ; R20.1@13.081,-3.244 R20.1@13.066,-3.244 ; R20.1@13.127,-3.198 13.179,-3.146 13.454,-3.146 14.605,-1.995 pad.8@14.605,-1.651
CHANGE: *25.5 | length 19.4
  Top Layer w0.254: *25.5@39.497,12.192 40.674,11.015 51.921,11.015 v3(52.906,12) v3(52.906,9.46)
  Bottom Layer w0.254: v3(52.906,12) v3(52.906,14.54)
CHG: *9.45 R5.1 | length 1.6
  Top Layer w0.254: v2(6.419,-10.033) 6.419,-10.083 6.517,-10.181 6.632,-10.181 6.644,-10.193 *9.45@7.944,-10.193
Connect: *4.1 *4.2 *4.3 m1.D m2.D m3.D m4.D m5.D m6.D m7.D m8.D pad.2@-43.053,-0.127 R8.1 | length 47.9
  Top Layer w0.254: v2(-0.762,-5.588) -0.762,-6.496 -0.577,-6.681 R8.1@-0.577,-6.731
  Bottom Layer w0.254: pad.2@-43.053,-0.127 -41.465,-1.714 pad.2@-34.798,-8.382
  Bottom Layer w2: pad.2@-34.798,-8.382 -22.352,-8.382 pad.2@-19.939,-8.382 ; v1(-19.939,-9.017) -6.604,-9.017 -3.683,-6.096 -1.016,-6.096
  other v1: -66.929,-9.144 -64.643,-9.144 -62.23,-9.144 -59.944,-9.144 -57.531,-9.144 -54.356,-9.144 -52.07,-9.144 -49.657,-9.144 -47.371,-9.144 -44.958,-9.144 -41.91,-9.144 -39.624,-9.144 -37.211,-9.144 -34.925,-9.144 -32.512,-9.144 -29.337,-9.017 -27.051,-9.017 -24.638,-9.017 -22.352,-9.017 -66.929,-6.858 -64.643,-6.858 -62.23,-6.858 -59.944,-6.858 -57.531,-6.858 -54.356,-6.858 -52.07,-6.858 -49.657,-6.858 -47.371,-6.858 -44.958,-6.858 -41.91,-6.858 -39.624,-6.858 -37.211,-6.858 -34.925,-6.858 -32.512,-6.858 -29.337,-6.731 -27.051,-6.731 -24.638,-6.731 -22.352,-6.731 -19.939,-6.731 -66.929,-4.445 -64.643,-4.445 -62.23,-4.445 -59.944,-4.445 -57.531,-4.445 -54.356,-4.445 -52.07,-4.445 -49.657,-4.445 -47.371,-4.445 -44.958,-4.445 -41.91,-4.445 -39.624,-4.445 -37.211,-4.445 -34.925,-4.445 -32.512,-4.445 -29.337,-4.318 -27.051,-4.318 -24.638,-4.318 -22.352,-4.318 -19.939,-4.318 -66.929,-2.159 -64.643,-2.159 -62.23,-2.159 -59.944,-2.159 -57.531,-2.159 -54.356,-2.159 -52.07,-2.159 -49.657,-2.159 -47.371,-2.159 -44.958,-2.159 -41.91,-2.159 -39.624,-2.159 -37.211,-2.159 -34.925,-2.159 -32.512,-2.159 -29.337,-2.032 -27.051,-2.032 -24.638,-2.032 -22.352,-2.032 -19.939,-2.032 -66.929,2.286 -64.643,2.286 -62.23,2.286 -59.944,2.286 -57.531,2.286 -54.483,2.286 -52.197,2.286 -49.784,2.286 -47.498,2.286 -45.085,2.286 -41.91,2.286 -39.624,2.286 -37.211,2.286 -34.925,2.286 -32.512,2.286 -29.337,2.413 -27.051,2.413 -24.638,2.413 -22.352,2.413 -19.939,2.413 -66.929,4.699 -64.643,4.699 -62.23,4.699 -59.944,4.699 -57.531,4.699 -54.483,4.699 -52.197,4.699 -49.784,4.699 -47.498,4.699 -45.085,4.699 -41.91,4.699 -39.624,4.699 -37.211,4.699 -34.925,4.699 -32.512,4.699 -29.337,4.826 -27.051,4.826 -24.638,4.826 -22.352,4.826 -19.939,4.826 -66.929,6.985 -64.643,6.985 -62.23,6.985 -59.944,6.985 -57.531,6.985 -54.483,6.985 -52.197,6.985 -49.784,6.985 -47.498,6.985 -45.085,6.985 -41.91,6.985 -39.624,6.985 -37.211,6.985 -34.925,6.985 -32.512,6.985 -29.337,7.112 -27.051,7.112 -24.638,7.112 -22.352,7.112 -19.939,7.112 -66.929,9.144 -64.643,9.144 -62.23,9.144 -59.944,9.144 -57.531,9.144 -54.483,9.144 -52.197,9.144 -49.784,9.144 -47.498,9.144 -45.085,9.144 -41.91,9.144 -39.624,9.144 -37.211,9.144 -34.925,9.144 -32.512,9.144 -29.337,9.271 -27.051,9.271 -24.638,9.271 -22.352,9.271 -19.939,9.271
  other v2: -2.794,-6.604 -1.778,-6.604 -0.669,-6.588 -2.794,-5.588 -1.778,-5.588
DSG: *1.1 *9.43 R2.2 | length 18.7
  Top Layer w0.254: v2(6.419,-9.144) 6.468,-9.193 *9.43@7.944,-9.193
  Bottom Layer w0.254: v2(6.419,-9.144) 5.973,-8.698 5.973,7.116 v2(6.477,7.62)
FUSE_OUT: *10.3 C1.1 C2.1 C3.1 C4.1 C5.2 C6.2 C7.2 C8.2 C9.2 C10.2 C11.2 C12.2 F1.2 | length 27.2
  Top Layer w0.254: *10.3@18.542,29.179 *10.3@19.542,29.179 ; C1.1@20.828,11.557 C1.1@21.336,12.065
  Top Layer w2: *10.3@19.542,29.179 21.859,31.496 28.321,31.496
  Top Layer w4: *10.3@18.542,28.996 20.836,26.702 C4.1@20.836,22.725 ; F1.2@25.273,4.191 C3.1@25.273,12.7